# Altium PCB PCB1.PcbDoc
Units mil, origin at the board's own origin, x right, y up, seen from the top; angles counter-clockwise.
Board outline 6000 x 4000 mil, 2 copper layers (Top Layer, Bottom Layer); 14 components, 18 nets, 99 pads, 0 vias.
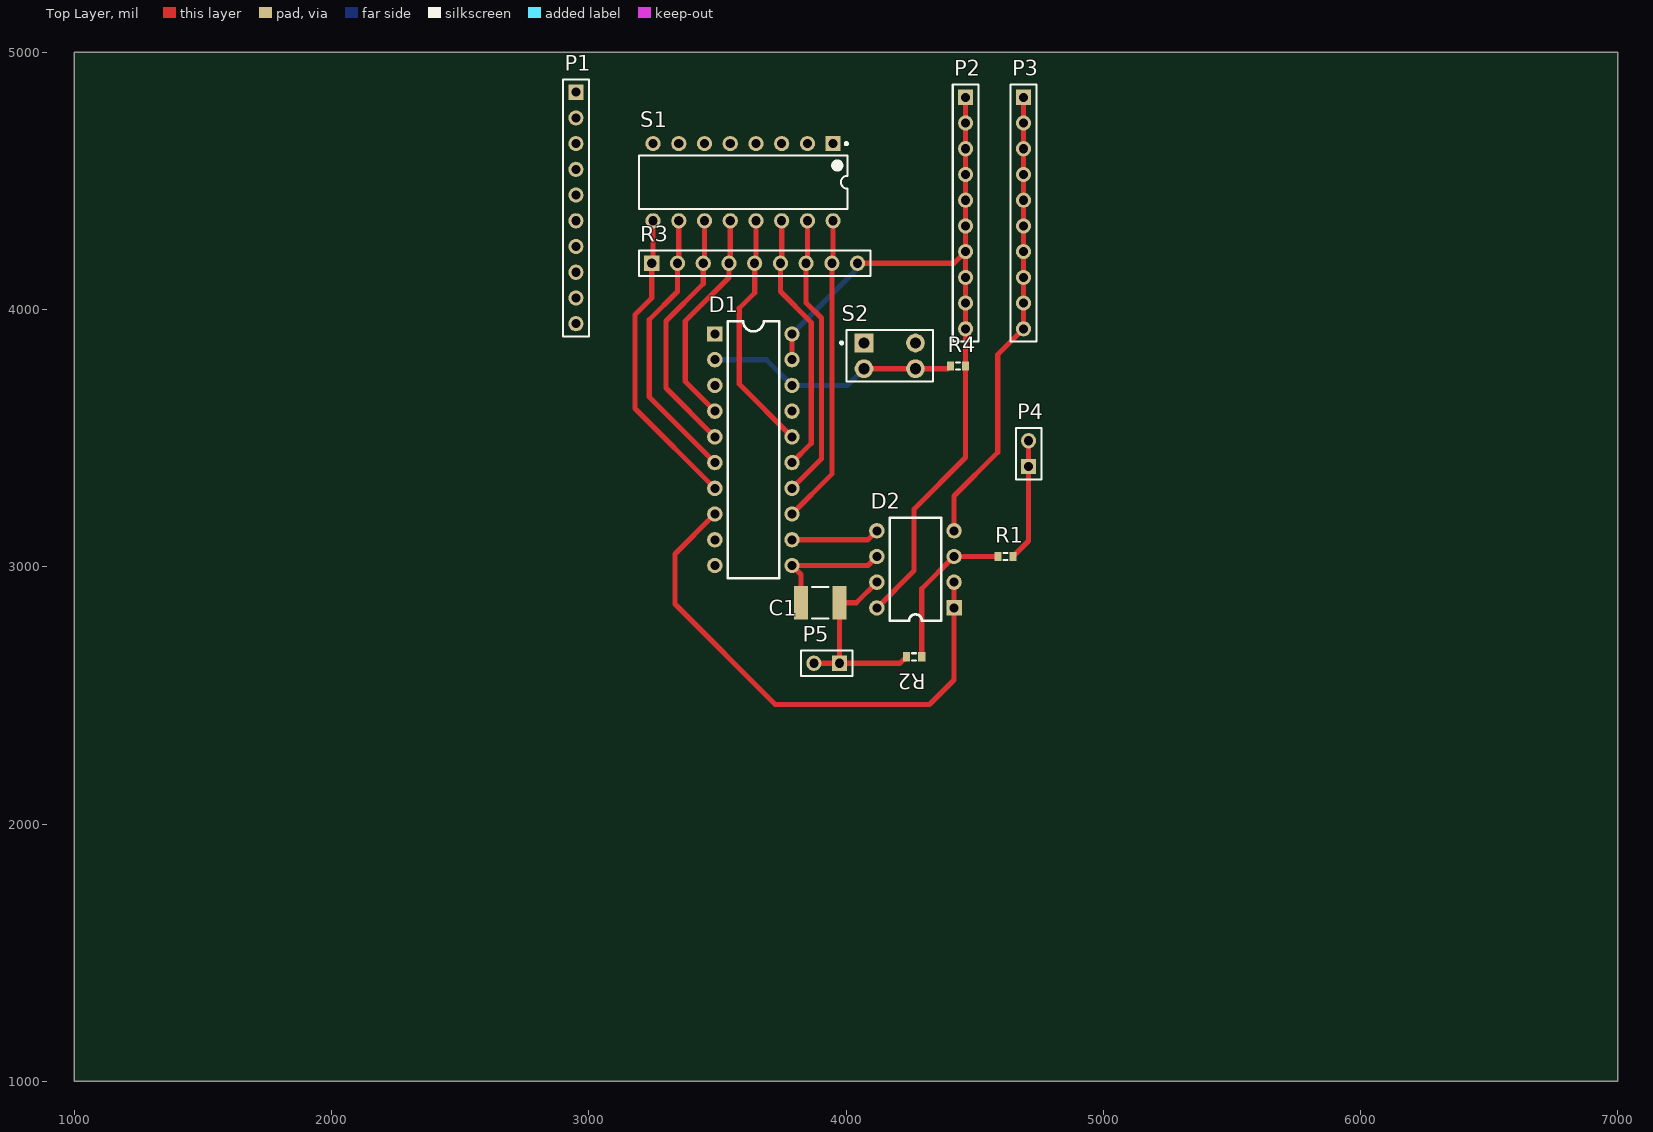
[diagram p0: Top Layer view]
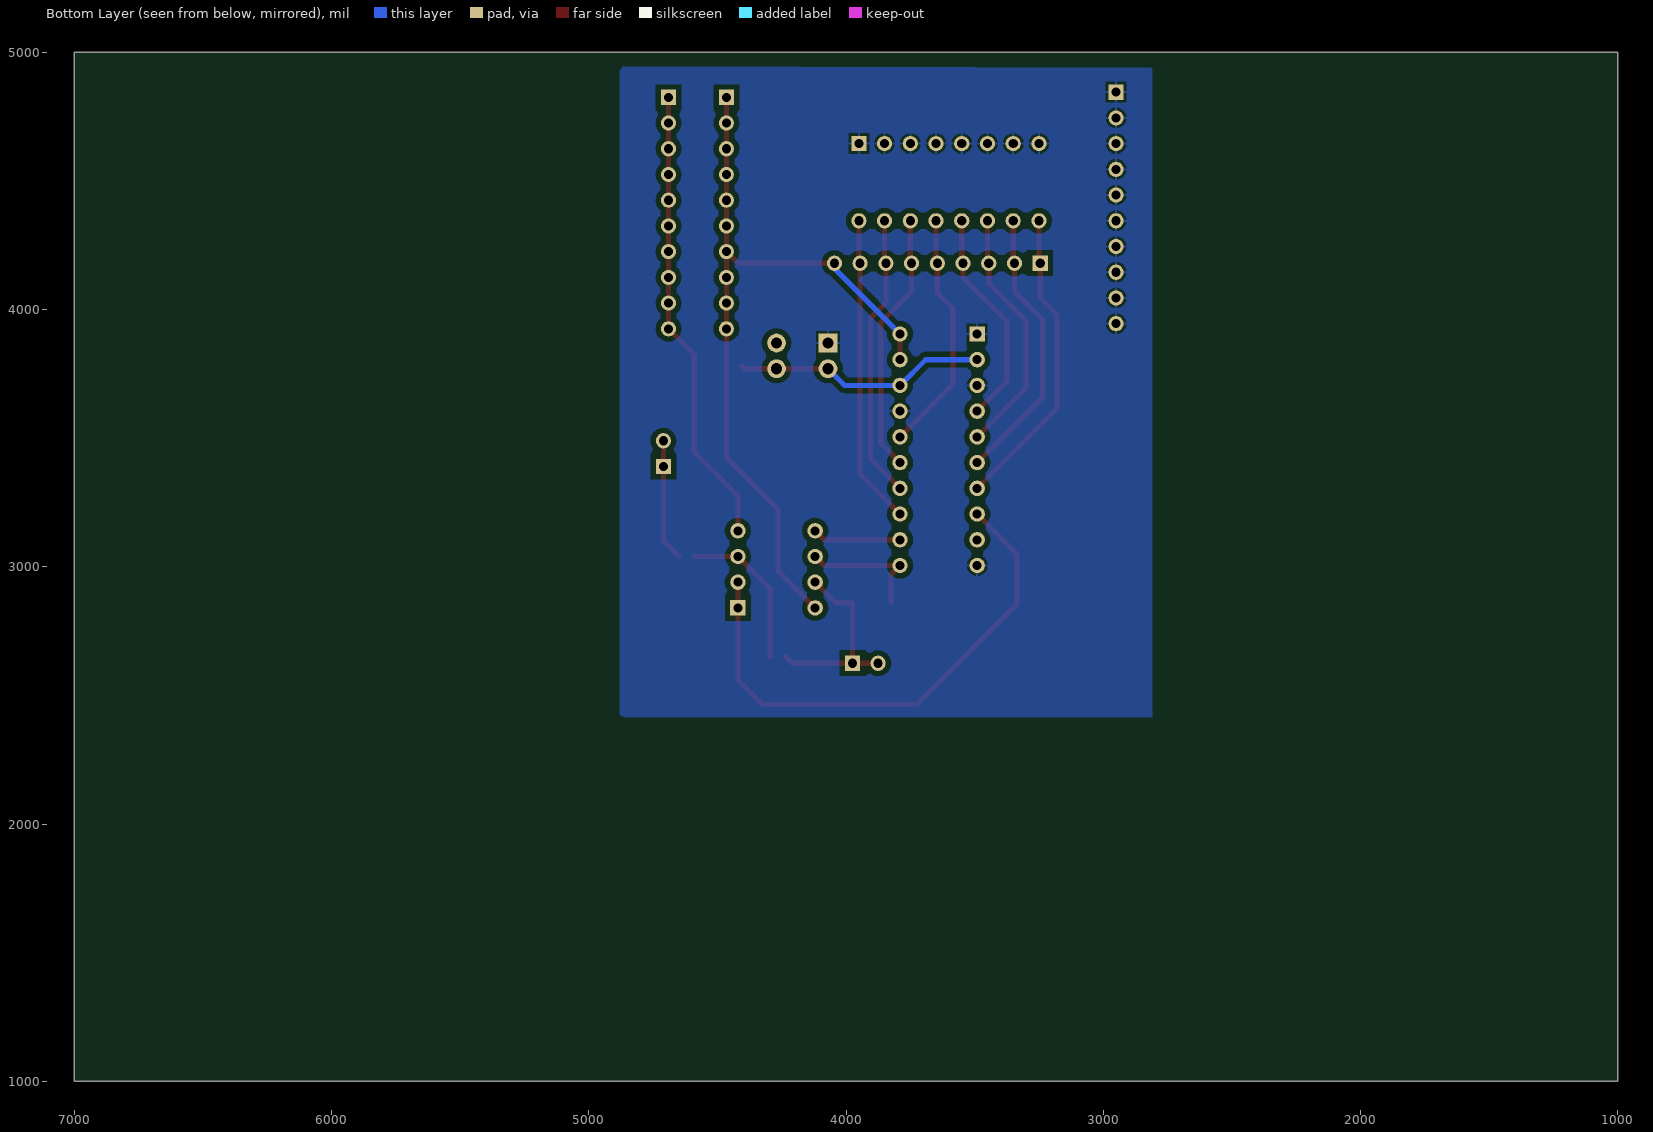
[diagram p1: Bottom Layer view, seen from below]

## Layer stack, top to bottom
Top Solder: solder mask 0.4, Solder Resist, Dk 3.5
Top Layer: signal copper 1.4
Dielectric 1: dielectric 12.6, FR-4, Dk 4.8
Bottom Layer: signal copper 1.4
Bottom Solder: solder mask 0.4, Solder Resist, Dk 3.5

## Board outline
1000,1000 7000,1000 7000,5000 1000,5000

## Design rules (kind name [scope] priority, off if disabled: settings)
Clearance [All] p1: gap=20
PolygonConnect [All] p1: connectstyle=Relief reliefconductorwidth=10 reliefentries=4 polygonreliefangle="90 Angle" airgapwidth=10
RoutingVias [All] p1: holewidth=28 width=50 viastyle="Through Hole" minholewidth=28 minwidth=50 maxholewidth=28 maxwidth=50
SolderMaskExpansion [All] p1: expansion=4
Width [All] p1: maxlimit=50 minlimit=10 preferedwidth=20
30 further rules are at their usual default settings.

## Components (designator, comment, footprint, x,y, rotation, side; value= is the part's Value field where it differs from the comment)
C1 "Cap Pol3" 1812 3900,2860 r180 top
D1 "DAC" DIP-20N 3490,3905 r0 top
D2 "D" DIP-8N 4420,2840 r180 top
P1 "Header 10" HDR1X10 2950,4845 r270 top
P2 "Header 10" HDR1X10 4465,4825 r270 top
P3 "Header 10" HDR1X10 4690,4825 r270 top
P4 "Header 2" HDR1X2 4710,3390 r90 top
P5 "Header 2" HDR1X2 3975,2625 r180 top
R1 "Res3" J1-0603 4620,3040 r180 top
R2 "Res3" J1-0603 4265,2650 r180 top
R3 "Res 9" HDR1X9 3245,4180 r0 top
R4 "Res3" J1-0603 4435,3780 r180 top
S1 "SW DIP-8" DIP-16 3600,4495 r270 top
S2 "SW-DPST" DPST-4 4170,3820 r0 top

## Footprints (in the part's own frame and the unit in brackets; to place one, negate y for a bottom-side part, rotate by r counter-clockwise, add the part's x,y. Pads: shape width x height; smd on the part's side, far side on the other; paste and mask are expansions set on the pad)
1812 [mm] "Chip Capacitor, Body 4.5x3.2mm, IPC High Density"
  rect 1.4x3.3 smd: 1(-1.9,0) 2(1.9,0)
  silkscreen extent -0.8,-1.55 0.8,1.55, body extent -2.4,-1.7 2.4,1.7, height 1.4
DIP-8N [mil]
  rect 60x60 hole 35: 1(0,0)
  round 60 hole 35: 2(0,-100) 3(0,-200) 4(0,-300) 5(300,-300) 6(300,-200) 7(300,-100) 8(300,0)
  silkscreen extent 50,-350 250,50
DIP-16 [mm] "DIP; 16 Leads; Row Spacing 7.62 mm; Pitch 2.54 mm"
  rect 1.5x1.5 hole 0.9: 1(-3.81,8.89)
  round 1.5 hole 0.9: 2(-3.81,6.35) 3(-3.81,3.81) 4(-3.81,1.27) 5(-3.81,-1.27) 6(-3.81,-3.81) 7(-3.81,-6.35) 8(-3.81,-8.89) 9(3.81,-8.89) 10(3.81,-6.35) 11(3.81,-3.81) 12(3.81,-1.27) 13(3.81,1.27) 14(3.81,3.81) 15(3.81,6.35) 16(3.81,8.89)
  silkscreen extent -3.93,-10.3 2.65,10.32, body extent -3.6,-10.28 3.6,10.28, height 5.08
DIP-20N [mil]
  rect 60x60 hole 35: 1(0,0)
  round 60 hole 35: 2(0,-100) 3(0,-200) 4(0,-300) 5(0,-400) 6(0,-500) 7(0,-600) 8(0,-700) 9(0,-800) 10(0,-900) 11(300,-900) 12(300,-800) 13(300,-700) 14(300,-600) 15(300,-500) 16(300,-400) 17(300,-300) 18(300,-200) 19(300,-100) 20(300,0)
  silkscreen extent 50,-950 250,50
DPST-4 [mm] "Switch; 4 Leads"
  rect 1.85x1.85 hole 1.1: 1(-2.54,1.27)
  round 1.85 hole 1.1: 2(-2.54,-1.27) 3(2.54,-1.27) 4(2.54,1.27)
  silkscreen extent -4.88,-2.54 4.28,2.54
HDR1X2 [mm] "Connector; Header; 2 Position"
  rect 1.5x1.5 hole 0.9: 1(0,0)
  round 1.5 hole 0.9: 2(2.54,0)
  silkscreen extent -1.27,-1.27 3.81,1.27
HDR1X9 [mm] "Connector; Header; 9 Position"
  rect 1.5x1.5 hole 0.9: 1(0,0)
  round 1.5 hole 0.9: 2(2.54,0) 3(5.08,0) 4(7.62,0) 5(10.16,0) 6(12.7,0) 7(15.24,0) 8(17.78,0) 9(20.32,0)
  silkscreen extent -1.27,-1.27 21.59,1.27
HDR1X10 [mm] "Connector; Header; 10 Position"
  rect 1.5x1.5 hole 0.9: 1(0,0)
  round 1.5 hole 0.9: 2(2.54,0) 3(5.08,0) 4(7.62,0) 5(10.16,0) 6(12.7,0) 7(15.24,0) 8(17.78,0) 9(20.32,0) 10(22.86,0)
  silkscreen extent -1.27,-1.27 24.13,1.27
J1-0603 [mm] "Chip Resistor, Body 1.6x0.8mm, IPC High Density"
  rect 0.7x0.9 smd: 1(-0.75,0) 2(0.75,0)
  silkscreen extent -0.2,-0.35 0.2,0.35, body extent -0.85,-0.48 0.85,0.48, height 0.9

## Part data
C1: "Polarized Capacitor (Surface Mount)"
D1: library part DAC0832
D2: library part TL082
P1 P2 P3: "Header, 10-Pin"
P4 P5: "Header, 2-Pin"
R1 R2 R4: "Resistor"
S1: "DIP Switch, 8 Position, SPST"
S2: library part 6x6开关

## Nets (pads, with @x,y where several pads share a name; then routed paths per layer and width w, separated by ;. In a path a pad name is that pad's centre, name@x,y a point inside that pad or via, vN(x,y) a via of type N, cw(c..) or ccw(c..) an arc to the next point about the centre after c; other vN are vias at no path point)
5V: D1.19 D1.20 D2.8 P2.1 P2.2 P2.3 P2.4 P2.5 P2.6 P2.7 P2.8 P2.9 P2.10 R3.9 R4.1 | length 3047.2
  Top Layer w20: D1.19 D1.20 ; R3.9 4420,4180 P2.7 ; D2.8 4265,2985 4265,3225 4464.53,3424.53 4464.53,3680 4465,3680.47 P2.10 P2.9 P2.8 P2.7 ; P2.1 P2.2 P2.3 P2.4 P2.5 P2.6 P2.7
  Bottom Layer w20: D1.20 4045,4160 R3.9
-5V: D2.4 P3.1 P3.2 P3.3 P3.4 P3.5 P3.6 P3.7 P3.8 P3.9 P3.10 | length 1796.8
  Top Layer w20: D2.4 4420,3275 4590,3445 4590,3825 P3.10 P3.9 P3.8 P3.7 P3.6 P3.5 P3.4 P3.3 P3.2 P3.1
GND: D1.1 D1.3 D1.10 D1.17 P1.1 P1.2 P1.3 P1.4 P1.5 P1.6 P1.7 P1.8 P1.9 P1.10 S1.1 S1.2 S1.3 S1.4 S1.5 S1.6 S1.7 S1.8 S2.1
NetC1_1: C1.1 D2.7 P5.1 P5.2 R2.2 | length 784.2
  Top Layer w20: P5.2 P5.1 ; D2.7 4040,2860 C1.1 3974.8,2625.2 P5.1 ; R2.2 4210.47,2625 P5.1
NetC1_2: C1.2 D1.11 D2.6 | length 504.1
  Top Layer w20: C1.2 3825.2,2969.8 D1.11 4085,3005 D2.6
NetD1_4: D1.4 R3.4 S1.12 | length 860.1
  Top Layer w20: D1.4 3375,3720 3375,3955 3545,4125 R3.4 3550,4185 S1.12
NetD1_5: D1.5 R3.3 S1.11 | length 980.8
  Top Layer w20: S1.11 3450,4185 R3.3 3445,4100 3300,3955 3300,3695 D1.5
NetD1_6: D1.6 R3.2 S1.10 | length 1093.3
  Top Layer w20: S1.10 3350,4185 R3.2 3345,4070 3235,3960 3235,3660 D1.6
NetD1_7: D1.7 R3.1 S1.9 | length 1197.4
  Top Layer w20: S1.9 3250,4185 R3.1 3245,4045 3180,3980 3180,3615 D1.7
NetD1_8: D1.8 D2.1 D2.2 | length 2080.1
  Top Layer w20: D1.8 3335,3050 3335,2855 3725,2465 4325,2465 4420,2560 D2.1 D2.2
NetD1_12: D1.12 D2.5 | length 344.5
  Top Layer w20: D1.12 4085,3105 D2.5
NetD1_13: D1.13 R3.8 S1.16 | length 1206.3
  Top Layer w20: D1.13 3945,3360 R3.8 3950,4185 S1.16
NetD1_14: D1.14 R3.7 S1.15 | length 1114.6
  Top Layer w20: D1.14 3905,3420 3905,3966.57 3845,4026.57 R3.7 3850,4185 S1.15
NetD1_15: D1.15 R3.6 S1.14 | length 1022.8
  Top Layer w20: S1.14 3750,4185 R3.6 3745,4070 3865,3950 3865,3480 D1.15
NetD1_16: D1.16 R3.5 S1.13 | length 951.8
  Top Layer w20: S1.13 3650,4185 R3.5 3645,4065 3585,4005 3585,3710 D1.16
NetD1_18: D1.2 D1.18 R4.2 S2.2 S2.3 | length 988
  Top Layer w20: S2.2 S2.3 4395.47,3770 R4.2
  Bottom Layer w20: D1.2 3690,3805 D1.18 4005,3705 S2.2
NetD2_3: D2.3 R1.2 R2.1 | length 612.4
  Top Layer w20: R2.1 4294.53,2914.53 D2.3 R1.2
NetP4_1: P4.1 P4.2 R1.1 | length 475
  Top Layer w20: R1.1 4710,3100.47 P4.1 P4.2
pads on no net: D1.9 S2.4

## Polygon pours and split planes (outlines as drawn)
GND on Bottom Layer "Top Layer-No Net" (solid, pour order 6): 2800,4940 2810,4930 2810,2415 4860,2415 4875,2400 4880,2405 4880,4945